# EAGLE board LilyPad_Rainbow LED-Panel-2x (EAGLE 6.4)
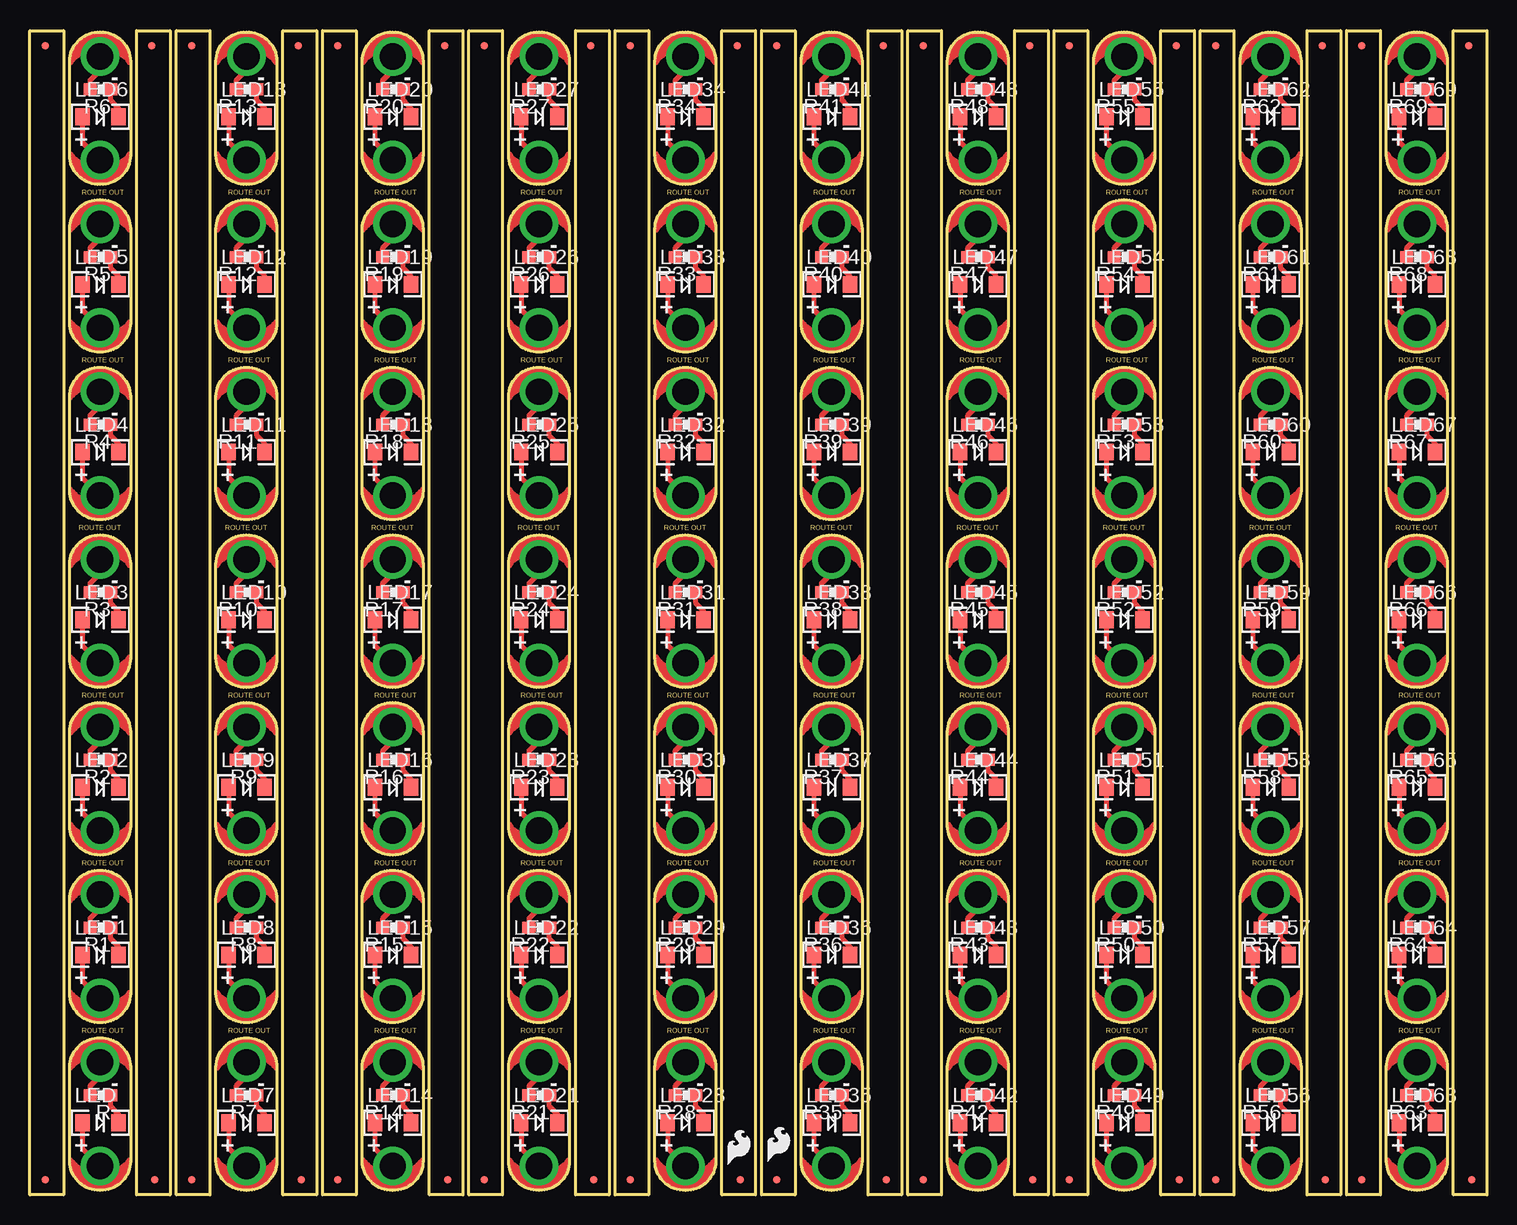
[diagram p0: board, top side]
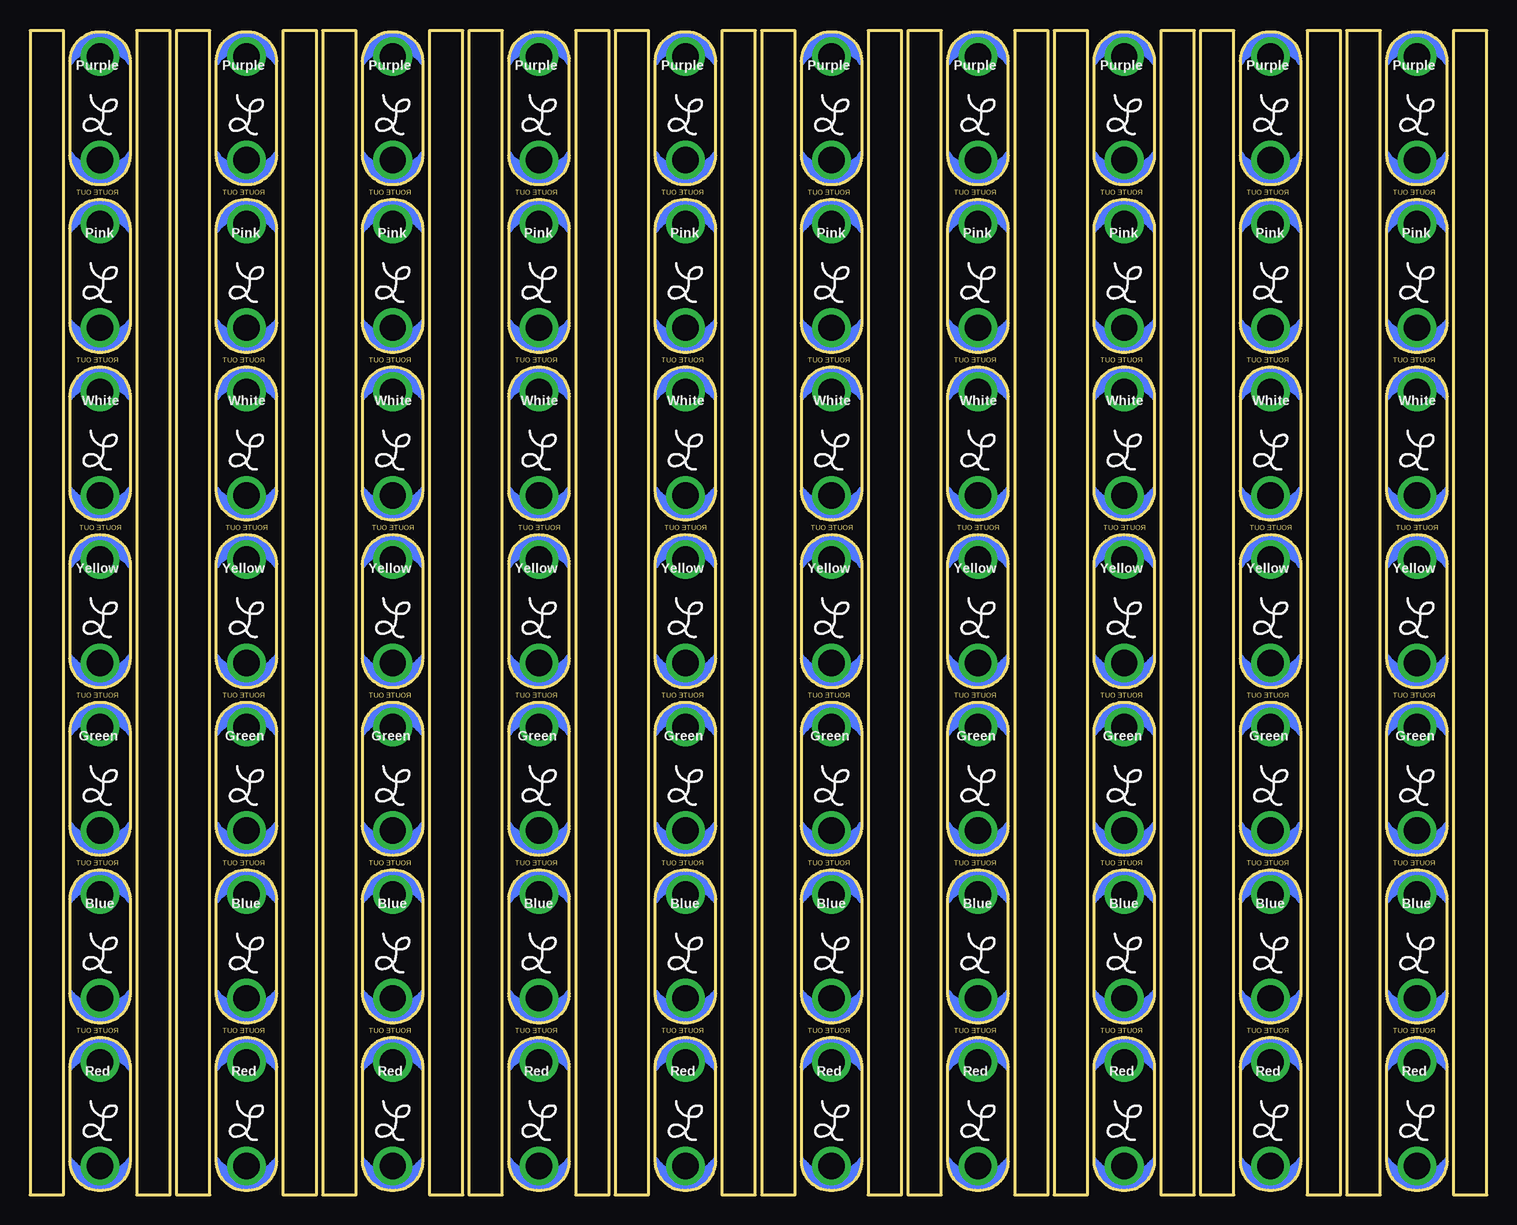
[diagram p1: board, bottom side, seen from below]

Size 121.41 x 97.03 mm. Coordinates in mm from the lower left corner, seen from the top.
Outline: 500 segments
Copper layers (1*16): Top 0.035mm / dielectric 1.5mm / Bottom 0.035mm
Design rules "SparkFun": minimum track width 8mil, minimum drill 20mil, track to track 8mil, track to pad 8mil, pad to pad 8mil, via to via 8mil, smd to smd 8mil, copper to edge 8mil, drill to drill 8mil, minimum pad ring 12mil, minimum via ring 10mil, stop-mask expansion 4mil, vias tented up to drill 20mil, thermal gap 10mil

## Footprints (pad centres in the part's own frame; a part is rotated, then mirrored left to right if it is on the bottom)
MICRO-FIDUCIAL = smd 0.635 x 0.635: 1 0,0
LED-1206 = smd 1.2 x 1.4: A -1.5,0; C 1.5,0
PETAL-SMALL = drill 2.2: 1 0,0
0603-RES = smd 1.1 x 1: 1 -0.85,0; 2 0.85,0

## Placement (x,y rotation side)
E$1  [MICRO-FIDUCIAL]  1.27,95.76 0 top
E$2  [MICRO-FIDUCIAL]  10.16,95.76 0 top
E$3  [MICRO-FIDUCIAL]  1.27,1.27 0 top
E$4  [MICRO-FIDUCIAL]  10.41,1.27 0 top
E$5  [MICRO-FIDUCIAL]  13.46,95.76 0 top
E$6  [MICRO-FIDUCIAL]  22.35,95.76 0 top
E$7  [MICRO-FIDUCIAL]  13.46,1.27 0 top
E$8  [MICRO-FIDUCIAL]  22.61,1.27 0 top
E$9  [MICRO-FIDUCIAL]  25.65,95.76 0 top
E$10  [MICRO-FIDUCIAL]  34.54,95.76 0 top
E$11  [MICRO-FIDUCIAL]  25.65,1.27 0 top
E$12  [MICRO-FIDUCIAL]  34.8,1.27 0 top
E$13  [MICRO-FIDUCIAL]  37.85,95.76 0 top
E$14  [MICRO-FIDUCIAL]  46.74,95.76 0 top
E$15  [MICRO-FIDUCIAL]  37.85,1.27 0 top
E$16  [MICRO-FIDUCIAL]  46.99,1.27 0 top
E$17  [MICRO-FIDUCIAL]  50.04,95.76 0 top
E$18  [MICRO-FIDUCIAL]  58.93,95.76 0 top
E$19  [MICRO-FIDUCIAL]  50.04,1.27 0 top
E$20  [MICRO-FIDUCIAL]  59.18,1.27 0 top
E$21  [MICRO-FIDUCIAL]  62.23,95.76 0 top
E$22  [MICRO-FIDUCIAL]  71.12,95.76 0 top
E$23  [MICRO-FIDUCIAL]  62.23,1.27 0 top
E$24  [MICRO-FIDUCIAL]  71.37,1.27 0 top
E$25  [MICRO-FIDUCIAL]  74.42,95.76 0 top
E$26  [MICRO-FIDUCIAL]  83.31,95.76 0 top
E$27  [MICRO-FIDUCIAL]  74.42,1.27 0 top
E$28  [MICRO-FIDUCIAL]  83.57,1.27 0 top
E$29  [MICRO-FIDUCIAL]  86.61,95.76 0 top
E$30  [MICRO-FIDUCIAL]  95.5,95.76 0 top
E$31  [MICRO-FIDUCIAL]  86.61,1.27 0 top
E$32  [MICRO-FIDUCIAL]  95.76,1.27 0 top
E$33  [MICRO-FIDUCIAL]  98.81,95.76 0 top
E$34  [MICRO-FIDUCIAL]  107.7,95.76 0 top
E$35  [MICRO-FIDUCIAL]  98.81,1.27 0 top
E$36  [MICRO-FIDUCIAL]  107.95,1.27 0 top
E$37  [MICRO-FIDUCIAL]  111,95.76 0 top
E$38  [MICRO-FIDUCIAL]  119.89,95.76 0 top
E$39  [MICRO-FIDUCIAL]  111,1.27 0 top
E$40  [MICRO-FIDUCIAL]  120.14,1.27 0 top
E$41  [SFE-LOGO-FLAME]  61.47,2.79 0 top
E$42  [SFE-LOGO-FLAME]  58.17,2.54 0 top
LED  White  [LED-1206]  5.86,6.02 0 top
LED1  White  [LED-1206]  5.86,19.99 0 top
LED2  White  [LED-1206]  5.86,33.96 0 top
LED3  White  [LED-1206]  5.86,47.93 0 top
LED4  White  [LED-1206]  5.86,61.9 0 top
LED5  White  [LED-1206]  5.86,75.87 0 top
LED6  White  [LED-1206]  5.86,89.84 0 top
LED7  White  [LED-1206]  18.05,6.02 0 top
LED8  White  [LED-1206]  18.05,19.99 0 top
LED9  White  [LED-1206]  18.05,33.96 0 top
LED10  White  [LED-1206]  18.05,47.93 0 top
LED11  White  [LED-1206]  18.05,61.9 0 top
LED12  White  [LED-1206]  18.05,75.87 0 top
LED13  White  [LED-1206]  18.05,89.84 0 top
LED14  White  [LED-1206]  30.25,6.02 0 top
LED15  White  [LED-1206]  30.25,19.99 0 top
LED16  White  [LED-1206]  30.25,33.96 0 top
LED17  White  [LED-1206]  30.25,47.93 0 top
LED18  White  [LED-1206]  30.25,61.9 0 top
LED19  White  [LED-1206]  30.25,75.87 0 top
LED20  White  [LED-1206]  30.25,89.84 0 top
LED21  White  [LED-1206]  42.44,6.02 0 top
LED22  White  [LED-1206]  42.44,19.99 0 top
LED23  White  [LED-1206]  42.44,33.96 0 top
LED24  White  [LED-1206]  42.44,47.93 0 top
LED25  White  [LED-1206]  42.44,61.9 0 top
LED26  White  [LED-1206]  42.44,75.87 0 top
LED27  White  [LED-1206]  42.44,89.84 0 top
LED28  White  [LED-1206]  54.63,6.02 0 top
LED29  White  [LED-1206]  54.63,19.99 0 top
LED30  White  [LED-1206]  54.63,33.96 0 top
LED31  White  [LED-1206]  54.63,47.93 0 top
LED32  White  [LED-1206]  54.63,61.9 0 top
LED33  White  [LED-1206]  54.63,75.87 0 top
LED34  White  [LED-1206]  54.63,89.84 0 top
LED35  White  [LED-1206]  66.82,6.02 0 top
LED36  White  [LED-1206]  66.82,19.99 0 top
LED37  White  [LED-1206]  66.82,33.96 0 top
LED38  White  [LED-1206]  66.82,47.93 0 top
LED39  White  [LED-1206]  66.82,61.9 0 top
LED40  White  [LED-1206]  66.82,75.87 0 top
LED41  White  [LED-1206]  66.82,89.84 0 top
LED42  White  [LED-1206]  79.01,6.02 0 top
LED43  White  [LED-1206]  79.01,19.99 0 top
LED44  White  [LED-1206]  79.01,33.96 0 top
LED45  White  [LED-1206]  79.01,47.93 0 top
LED46  White  [LED-1206]  79.01,61.9 0 top
LED47  White  [LED-1206]  79.01,75.87 0 top
LED48  White  [LED-1206]  79.01,89.84 0 top
LED49  White  [LED-1206]  91.21,6.02 0 top
LED50  White  [LED-1206]  91.21,19.99 0 top
LED51  White  [LED-1206]  91.21,33.96 0 top
LED52  White  [LED-1206]  91.21,47.93 0 top
LED53  White  [LED-1206]  91.21,61.9 0 top
LED54  White  [LED-1206]  91.21,75.87 0 top
LED55  White  [LED-1206]  91.21,89.84 0 top
LED56  White  [LED-1206]  103.4,6.02 0 top
LED57  White  [LED-1206]  103.4,19.99 0 top
LED58  White  [LED-1206]  103.4,33.96 0 top
LED59  White  [LED-1206]  103.4,47.93 0 top
LED60  White  [LED-1206]  103.4,61.9 0 top
LED61  White  [LED-1206]  103.4,75.87 0 top
LED62  White  [LED-1206]  103.4,89.84 0 top
LED63  White  [LED-1206]  115.59,6.02 0 top
LED64  White  [LED-1206]  115.59,19.99 0 top
LED65  White  [LED-1206]  115.59,33.96 0 top
LED66  White  [LED-1206]  115.59,47.93 0 top
LED67  White  [LED-1206]  115.59,61.9 0 top
LED68  White  [LED-1206]  115.59,75.87 0 top
LED69  White  [LED-1206]  115.59,89.84 0 top
LED+  SEWTAP6  [PETAL-SMALL]  5.84,2.41 0 top
LED+1  SEWTAP6  [PETAL-SMALL]  5.84,16.38 0 top
LED+2  SEWTAP6  [PETAL-SMALL]  5.84,30.35 0 top
LED+3  SEWTAP6  [PETAL-SMALL]  5.84,44.32 0 top
LED+4  SEWTAP6  [PETAL-SMALL]  5.84,58.29 0 top
LED+5  SEWTAP6  [PETAL-SMALL]  5.84,72.26 0 top
LED+6  SEWTAP6  [PETAL-SMALL]  5.84,86.23 0 top
LED+7  SEWTAP6  [PETAL-SMALL]  18.03,2.41 0 top
LED+8  SEWTAP6  [PETAL-SMALL]  18.03,16.38 0 top
LED+9  SEWTAP6  [PETAL-SMALL]  18.03,30.35 0 top
LED+10  SEWTAP6  [PETAL-SMALL]  18.03,44.32 0 top
LED+11  SEWTAP6  [PETAL-SMALL]  18.03,58.29 0 top
LED+12  SEWTAP6  [PETAL-SMALL]  18.03,72.26 0 top
LED+13  SEWTAP6  [PETAL-SMALL]  18.03,86.23 0 top
LED+14  SEWTAP6  [PETAL-SMALL]  30.23,2.41 0 top
LED+15  SEWTAP6  [PETAL-SMALL]  30.23,16.38 0 top
LED+16  SEWTAP6  [PETAL-SMALL]  30.23,30.35 0 top
LED+17  SEWTAP6  [PETAL-SMALL]  30.23,44.32 0 top
LED+18  SEWTAP6  [PETAL-SMALL]  30.23,58.29 0 top
LED+19  SEWTAP6  [PETAL-SMALL]  30.23,72.26 0 top
LED+20  SEWTAP6  [PETAL-SMALL]  30.23,86.23 0 top
LED+21  SEWTAP6  [PETAL-SMALL]  42.42,2.41 0 top
LED+22  SEWTAP6  [PETAL-SMALL]  42.42,16.38 0 top
LED+23  SEWTAP6  [PETAL-SMALL]  42.42,30.35 0 top
LED+24  SEWTAP6  [PETAL-SMALL]  42.42,44.32 0 top
LED+25  SEWTAP6  [PETAL-SMALL]  42.42,58.29 0 top
LED+26  SEWTAP6  [PETAL-SMALL]  42.42,72.26 0 top
LED+27  SEWTAP6  [PETAL-SMALL]  42.42,86.23 0 top
LED+28  SEWTAP6  [PETAL-SMALL]  54.61,2.41 0 top
LED+29  SEWTAP6  [PETAL-SMALL]  54.61,16.38 0 top
LED+30  SEWTAP6  [PETAL-SMALL]  54.61,30.35 0 top
LED+31  SEWTAP6  [PETAL-SMALL]  54.61,44.32 0 top
LED+32  SEWTAP6  [PETAL-SMALL]  54.61,58.29 0 top
LED+33  SEWTAP6  [PETAL-SMALL]  54.61,72.26 0 top
LED+34  SEWTAP6  [PETAL-SMALL]  54.61,86.23 0 top
LED+35  SEWTAP6  [PETAL-SMALL]  66.8,2.41 0 top
LED+36  SEWTAP6  [PETAL-SMALL]  66.8,16.38 0 top
LED+37  SEWTAP6  [PETAL-SMALL]  66.8,30.35 0 top
LED+38  SEWTAP6  [PETAL-SMALL]  66.8,44.32 0 top
LED+39  SEWTAP6  [PETAL-SMALL]  66.8,58.29 0 top
LED+40  SEWTAP6  [PETAL-SMALL]  66.8,72.26 0 top
LED+41  SEWTAP6  [PETAL-SMALL]  66.8,86.23 0 top
LED+42  SEWTAP6  [PETAL-SMALL]  78.99,2.41 0 top
LED+43  SEWTAP6  [PETAL-SMALL]  78.99,16.38 0 top
LED+44  SEWTAP6  [PETAL-SMALL]  78.99,30.35 0 top
LED+45  SEWTAP6  [PETAL-SMALL]  78.99,44.32 0 top
LED+46  SEWTAP6  [PETAL-SMALL]  78.99,58.29 0 top
LED+47  SEWTAP6  [PETAL-SMALL]  78.99,72.26 0 top
LED+48  SEWTAP6  [PETAL-SMALL]  78.99,86.23 0 top
LED+49  SEWTAP6  [PETAL-SMALL]  91.19,2.41 0 top
LED+50  SEWTAP6  [PETAL-SMALL]  91.19,16.38 0 top
LED+51  SEWTAP6  [PETAL-SMALL]  91.19,30.35 0 top
LED+52  SEWTAP6  [PETAL-SMALL]  91.19,44.32 0 top
LED+53  SEWTAP6  [PETAL-SMALL]  91.19,58.29 0 top
LED+54  SEWTAP6  [PETAL-SMALL]  91.19,72.26 0 top
LED+55  SEWTAP6  [PETAL-SMALL]  91.19,86.23 0 top
LED+56  SEWTAP6  [PETAL-SMALL]  103.38,2.41 0 top
LED+57  SEWTAP6  [PETAL-SMALL]  103.38,16.38 0 top
LED+58  SEWTAP6  [PETAL-SMALL]  103.38,30.35 0 top
LED+59  SEWTAP6  [PETAL-SMALL]  103.38,44.32 0 top
LED+60  SEWTAP6  [PETAL-SMALL]  103.38,58.29 0 top
LED+61  SEWTAP6  [PETAL-SMALL]  103.38,72.26 0 top
LED+62  SEWTAP6  [PETAL-SMALL]  103.38,86.23 0 top
LED+63  SEWTAP6  [PETAL-SMALL]  115.57,2.41 0 top
LED+64  SEWTAP6  [PETAL-SMALL]  115.57,16.38 0 top
LED+65  SEWTAP6  [PETAL-SMALL]  115.57,30.35 0 top
LED+66  SEWTAP6  [PETAL-SMALL]  115.57,44.32 0 top
LED+67  SEWTAP6  [PETAL-SMALL]  115.57,58.29 0 top
LED+68  SEWTAP6  [PETAL-SMALL]  115.57,72.26 0 top
LED+69  SEWTAP6  [PETAL-SMALL]  115.57,86.23 0 top
LED-  SEWTAP6  [PETAL-SMALL]  5.84,11.05 180 top
LED-1  SEWTAP6  [PETAL-SMALL]  5.84,25.02 180 top
LED-2  SEWTAP6  [PETAL-SMALL]  5.84,38.99 180 top
LED-3  SEWTAP6  [PETAL-SMALL]  5.84,52.96 180 top
LED-4  SEWTAP6  [PETAL-SMALL]  5.84,66.93 180 top
LED-5  SEWTAP6  [PETAL-SMALL]  5.84,80.9 180 top
LED-6  SEWTAP6  [PETAL-SMALL]  5.84,94.87 180 top
LED-7  SEWTAP6  [PETAL-SMALL]  18.03,11.05 180 top
LED-8  SEWTAP6  [PETAL-SMALL]  18.03,25.02 180 top
LED-9  SEWTAP6  [PETAL-SMALL]  18.03,38.99 180 top
LED-10  SEWTAP6  [PETAL-SMALL]  18.03,52.96 180 top
LED-11  SEWTAP6  [PETAL-SMALL]  18.03,66.93 180 top
LED-12  SEWTAP6  [PETAL-SMALL]  18.03,80.9 180 top
LED-13  SEWTAP6  [PETAL-SMALL]  18.03,94.87 180 top
LED-14  SEWTAP6  [PETAL-SMALL]  30.23,11.05 180 top
LED-15  SEWTAP6  [PETAL-SMALL]  30.23,25.02 180 top
LED-16  SEWTAP6  [PETAL-SMALL]  30.23,38.99 180 top
LED-17  SEWTAP6  [PETAL-SMALL]  30.23,52.96 180 top
LED-18  SEWTAP6  [PETAL-SMALL]  30.23,66.93 180 top
LED-19  SEWTAP6  [PETAL-SMALL]  30.23,80.9 180 top
LED-20  SEWTAP6  [PETAL-SMALL]  30.23,94.87 180 top
LED-21  SEWTAP6  [PETAL-SMALL]  42.42,11.05 180 top
LED-22  SEWTAP6  [PETAL-SMALL]  42.42,25.02 180 top
LED-23  SEWTAP6  [PETAL-SMALL]  42.42,38.99 180 top
LED-24  SEWTAP6  [PETAL-SMALL]  42.42,52.96 180 top
LED-25  SEWTAP6  [PETAL-SMALL]  42.42,66.93 180 top
LED-26  SEWTAP6  [PETAL-SMALL]  42.42,80.9 180 top
LED-27  SEWTAP6  [PETAL-SMALL]  42.42,94.87 180 top
LED-28  SEWTAP6  [PETAL-SMALL]  54.61,11.05 180 top
LED-29  SEWTAP6  [PETAL-SMALL]  54.61,25.02 180 top
LED-30  SEWTAP6  [PETAL-SMALL]  54.61,38.99 180 top
LED-31  SEWTAP6  [PETAL-SMALL]  54.61,52.96 180 top
LED-32  SEWTAP6  [PETAL-SMALL]  54.61,66.93 180 top
LED-33  SEWTAP6  [PETAL-SMALL]  54.61,80.9 180 top
LED-34  SEWTAP6  [PETAL-SMALL]  54.61,94.87 180 top
LED-35  SEWTAP6  [PETAL-SMALL]  66.8,11.05 180 top
LED-36  SEWTAP6  [PETAL-SMALL]  66.8,25.02 180 top
LED-37  SEWTAP6  [PETAL-SMALL]  66.8,38.99 180 top
LED-38  SEWTAP6  [PETAL-SMALL]  66.8,52.96 180 top
LED-39  SEWTAP6  [PETAL-SMALL]  66.8,66.93 180 top
LED-40  SEWTAP6  [PETAL-SMALL]  66.8,80.9 180 top
LED-41  SEWTAP6  [PETAL-SMALL]  66.8,94.87 180 top
LED-42  SEWTAP6  [PETAL-SMALL]  78.99,11.05 180 top
LED-43  SEWTAP6  [PETAL-SMALL]  78.99,25.02 180 top
LED-44  SEWTAP6  [PETAL-SMALL]  78.99,38.99 180 top
LED-45  SEWTAP6  [PETAL-SMALL]  78.99,52.96 180 top
LED-46  SEWTAP6  [PETAL-SMALL]  78.99,66.93 180 top
LED-47  SEWTAP6  [PETAL-SMALL]  78.99,80.9 180 top
LED-48  SEWTAP6  [PETAL-SMALL]  78.99,94.87 180 top
LED-49  SEWTAP6  [PETAL-SMALL]  91.19,11.05 180 top
LED-50  SEWTAP6  [PETAL-SMALL]  91.19,25.02 180 top
LED-51  SEWTAP6  [PETAL-SMALL]  91.19,38.99 180 top
LED-52  SEWTAP6  [PETAL-SMALL]  91.19,52.96 180 top
LED-53  SEWTAP6  [PETAL-SMALL]  91.19,66.93 180 top
LED-54  SEWTAP6  [PETAL-SMALL]  91.19,80.9 180 top
LED-55  SEWTAP6  [PETAL-SMALL]  91.19,94.87 180 top
LED-56  SEWTAP6  [PETAL-SMALL]  103.38,11.05 180 top
LED-57  SEWTAP6  [PETAL-SMALL]  103.38,25.02 180 top
LED-58  SEWTAP6  [PETAL-SMALL]  103.38,38.99 180 top
LED-59  SEWTAP6  [PETAL-SMALL]  103.38,52.96 180 top
LED-60  SEWTAP6  [PETAL-SMALL]  103.38,66.93 180 top
LED-61  SEWTAP6  [PETAL-SMALL]  103.38,80.9 180 top
LED-62  SEWTAP6  [PETAL-SMALL]  103.38,94.87 180 top
LED-63  SEWTAP6  [PETAL-SMALL]  115.57,11.05 180 top
LED-64  SEWTAP6  [PETAL-SMALL]  115.57,25.02 180 top
LED-65  SEWTAP6  [PETAL-SMALL]  115.57,38.99 180 top
LED-66  SEWTAP6  [PETAL-SMALL]  115.57,52.96 180 top
LED-67  SEWTAP6  [PETAL-SMALL]  115.57,66.93 180 top
LED-68  SEWTAP6  [PETAL-SMALL]  115.57,80.9 180 top
LED-69  SEWTAP6  [PETAL-SMALL]  115.57,94.87 180 top
LOGO1  LOGO-LPL  [LOGO-L]  5.84,6.17 0 bottom
LOGO2  LOGO-LPL  [LOGO-L]  5.84,20.14 0 bottom
LOGO3  LOGO-LPL  [LOGO-L]  5.84,34.11 0 bottom
LOGO4  LOGO-LPL  [LOGO-L]  5.84,48.08 0 bottom
LOGO5  LOGO-LPL  [LOGO-L]  5.84,62.05 0 bottom
LOGO6  LOGO-LPL  [LOGO-L]  5.84,76.02 0 bottom
LOGO7  LOGO-LPL  [LOGO-L]  5.84,89.99 0 bottom
LOGO8  LOGO-LPL  [LOGO-L]  18.03,6.17 0 bottom
LOGO9  LOGO-LPL  [LOGO-L]  18.03,20.14 0 bottom
LOGO10  LOGO-LPL  [LOGO-L]  18.03,34.11 0 bottom
LOGO11  LOGO-LPL  [LOGO-L]  18.03,48.08 0 bottom
LOGO12  LOGO-LPL  [LOGO-L]  18.03,62.05 0 bottom
LOGO13  LOGO-LPL  [LOGO-L]  18.03,76.02 0 bottom
LOGO14  LOGO-LPL  [LOGO-L]  18.03,89.99 0 bottom
LOGO15  LOGO-LPL  [LOGO-L]  30.23,6.17 0 bottom
LOGO16  LOGO-LPL  [LOGO-L]  30.23,20.14 0 bottom
LOGO17  LOGO-LPL  [LOGO-L]  30.23,34.11 0 bottom
LOGO18  LOGO-LPL  [LOGO-L]  30.23,48.08 0 bottom
LOGO19  LOGO-LPL  [LOGO-L]  30.23,62.05 0 bottom
LOGO20  LOGO-LPL  [LOGO-L]  30.23,76.02 0 bottom
LOGO21  LOGO-LPL  [LOGO-L]  30.23,89.99 0 bottom
LOGO22  LOGO-LPL  [LOGO-L]  42.42,6.17 0 bottom
LOGO23  LOGO-LPL  [LOGO-L]  42.42,20.14 0 bottom
LOGO24  LOGO-LPL  [LOGO-L]  42.42,34.11 0 bottom
LOGO25  LOGO-LPL  [LOGO-L]  42.42,48.08 0 bottom
LOGO26  LOGO-LPL  [LOGO-L]  42.42,62.05 0 bottom
LOGO27  LOGO-LPL  [LOGO-L]  42.42,76.02 0 bottom
LOGO28  LOGO-LPL  [LOGO-L]  42.42,89.99 0 bottom
LOGO29  LOGO-LPL  [LOGO-L]  54.61,6.17 0 bottom
LOGO30  LOGO-LPL  [LOGO-L]  54.61,20.14 0 bottom
LOGO31  LOGO-LPL  [LOGO-L]  54.61,34.11 0 bottom
LOGO32  LOGO-LPL  [LOGO-L]  54.61,48.08 0 bottom
LOGO33  LOGO-LPL  [LOGO-L]  54.61,62.05 0 bottom
LOGO34  LOGO-LPL  [LOGO-L]  54.61,76.02 0 bottom
LOGO35  LOGO-LPL  [LOGO-L]  54.61,89.99 0 bottom
LOGO36  LOGO-LPL  [LOGO-L]  66.8,6.17 0 bottom
LOGO37  LOGO-LPL  [LOGO-L]  66.8,20.14 0 bottom
LOGO38  LOGO-LPL  [LOGO-L]  66.8,34.11 0 bottom
LOGO39  LOGO-LPL  [LOGO-L]  66.8,48.08 0 bottom
LOGO40  LOGO-LPL  [LOGO-L]  66.8,62.05 0 bottom
LOGO41  LOGO-LPL  [LOGO-L]  66.8,76.02 0 bottom
LOGO42  LOGO-LPL  [LOGO-L]  66.8,89.99 0 bottom
LOGO43  LOGO-LPL  [LOGO-L]  78.99,6.17 0 bottom
LOGO44  LOGO-LPL  [LOGO-L]  78.99,20.14 0 bottom
LOGO45  LOGO-LPL  [LOGO-L]  78.99,34.11 0 bottom
LOGO46  LOGO-LPL  [LOGO-L]  78.99,48.08 0 bottom
LOGO47  LOGO-LPL  [LOGO-L]  78.99,62.05 0 bottom
LOGO48  LOGO-LPL  [LOGO-L]  78.99,76.02 0 bottom
LOGO49  LOGO-LPL  [LOGO-L]  78.99,89.99 0 bottom
LOGO50  LOGO-LPL  [LOGO-L]  91.19,6.17 0 bottom
LOGO51  LOGO-LPL  [LOGO-L]  91.19,20.14 0 bottom
LOGO52  LOGO-LPL  [LOGO-L]  91.19,34.11 0 bottom
LOGO53  LOGO-LPL  [LOGO-L]  91.19,48.08 0 bottom
LOGO54  LOGO-LPL  [LOGO-L]  91.19,62.05 0 bottom
LOGO55  LOGO-LPL  [LOGO-L]  91.19,76.02 0 bottom
LOGO56  LOGO-LPL  [LOGO-L]  91.19,89.99 0 bottom
LOGO57  LOGO-LPL  [LOGO-L]  103.38,6.17 0 bottom
LOGO58  LOGO-LPL  [LOGO-L]  103.38,20.14 0 bottom
LOGO59  LOGO-LPL  [LOGO-L]  103.38,34.11 0 bottom
LOGO60  LOGO-LPL  [LOGO-L]  103.38,48.08 0 bottom
LOGO61  LOGO-LPL  [LOGO-L]  103.38,62.05 0 bottom
LOGO62  LOGO-LPL  [LOGO-L]  103.38,76.02 0 bottom
LOGO63  LOGO-LPL  [LOGO-L]  103.38,89.99 0 bottom
LOGO64  LOGO-LPL  [LOGO-L]  115.57,6.17 0 bottom
LOGO65  LOGO-LPL  [LOGO-L]  115.57,20.14 0 bottom
LOGO66  LOGO-LPL  [LOGO-L]  115.57,34.11 0 bottom
LOGO67  LOGO-LPL  [LOGO-L]  115.57,48.08 0 bottom
LOGO68  LOGO-LPL  [LOGO-L]  115.57,62.05 0 bottom
LOGO69  LOGO-LPL  [LOGO-L]  115.57,76.02 0 bottom
LOGO70  LOGO-LPL  [LOGO-L]  115.57,89.99 0 bottom
R  100  [0603-RES]  5.86,8.3 180 top
R1  100  [0603-RES]  5.86,22.27 180 top
R2  100  [0603-RES]  5.86,36.25 180 top
R3  100  [0603-RES]  5.86,50.22 180 top
R4  100  [0603-RES]  5.86,64.19 180 top
R5  100  [0603-RES]  5.86,78.16 180 top
R6  100  [0603-RES]  5.86,92.12 180 top
R7  100  [0603-RES]  18.05,8.3 180 top
R8  100  [0603-RES]  18.05,22.27 180 top
R9  100  [0603-RES]  18.05,36.25 180 top
R10  100  [0603-RES]  18.05,50.22 180 top
R11  100  [0603-RES]  18.05,64.19 180 top
R12  100  [0603-RES]  18.05,78.16 180 top
R13  100  [0603-RES]  18.05,92.12 180 top
R14  100  [0603-RES]  30.25,8.3 180 top
R15  100  [0603-RES]  30.25,22.27 180 top
R16  100  [0603-RES]  30.25,36.25 180 top
R17  100  [0603-RES]  30.25,50.22 180 top
R18  100  [0603-RES]  30.25,64.19 180 top
R19  100  [0603-RES]  30.25,78.16 180 top
R20  100  [0603-RES]  30.25,92.12 180 top
R21  100  [0603-RES]  42.44,8.3 180 top
R22  100  [0603-RES]  42.44,22.27 180 top
R23  100  [0603-RES]  42.44,36.25 180 top
R24  100  [0603-RES]  42.44,50.22 180 top
R25  100  [0603-RES]  42.44,64.19 180 top
R26  100  [0603-RES]  42.44,78.16 180 top
R27  100  [0603-RES]  42.44,92.12 180 top
R28  100  [0603-RES]  54.63,8.3 180 top
R29  100  [0603-RES]  54.63,22.27 180 top
R30  100  [0603-RES]  54.63,36.25 180 top
R31  100  [0603-RES]  54.63,50.22 180 top
R32  100  [0603-RES]  54.63,64.19 180 top
R33  100  [0603-RES]  54.63,78.16 180 top
R34  100  [0603-RES]  54.63,92.12 180 top
R35  100  [0603-RES]  66.82,8.3 180 top
R36  100  [0603-RES]  66.82,22.27 180 top
R37  100  [0603-RES]  66.82,36.25 180 top
R38  100  [0603-RES]  66.82,50.22 180 top
R39  100  [0603-RES]  66.82,64.19 180 top
R40  100  [0603-RES]  66.82,78.16 180 top
R41  100  [0603-RES]  66.82,92.12 180 top
R42  100  [0603-RES]  79.01,8.3 180 top
R43  100  [0603-RES]  79.01,22.27 180 top
R44  100  [0603-RES]  79.01,36.25 180 top
R45  100  [0603-RES]  79.01,50.22 180 top
R46  100  [0603-RES]  79.01,64.19 180 top
R47  100  [0603-RES]  79.01,78.16 180 top
R48  100  [0603-RES]  79.01,92.12 180 top
R49  100  [0603-RES]  91.21,8.3 180 top
R50  100  [0603-RES]  91.21,22.27 180 top
R51  100  [0603-RES]  91.21,36.25 180 top
R52  100  [0603-RES]  91.21,50.22 180 top
R53  100  [0603-RES]  91.21,64.19 180 top
R54  100  [0603-RES]  91.21,78.16 180 top
R55  100  [0603-RES]  91.21,92.12 180 top
R56  100  [0603-RES]  103.4,8.3 180 top
R57  100  [0603-RES]  103.4,22.27 180 top
R58  100  [0603-RES]  103.4,36.25 180 top
R59  100  [0603-RES]  103.4,50.22 180 top
R60  100  [0603-RES]  103.4,64.19 180 top
R61  100  [0603-RES]  103.4,78.16 180 top
R62  100  [0603-RES]  103.4,92.12 180 top
R63  100  [0603-RES]  115.59,8.3 180 top
R64  100  [0603-RES]  115.59,22.27 180 top
R65  100  [0603-RES]  115.59,36.25 180 top
R66  100  [0603-RES]  115.59,50.22 180 top
R67  100  [0603-RES]  115.59,64.19 180 top
R68  100  [0603-RES]  115.59,78.16 180 top
R69  100  [0603-RES]  115.59,92.12 180 top

## Library data of the parts
E$1-E$42 = SparkFun-Aesthetics
LED LED1-LED69 = SparkFun-3-2-07
LED+ LED+1-LED+69 LED- LED-1-LED-69 LOGO1-LOGO70 = LilyPad-Wearables
R R1-R69 = SparkFun

## Nets
+: LED+.1 LED.A
+1: LED1.A LED+1.1
+2: LED2.A LED+2.1
+3: LED3.A LED+3.1
+4: LED4.A LED+4.1
+5: LED5.A LED+5.1
+6: LED6.A LED+6.1
+7: LED7.A LED+7.1
+8: LED8.A LED+8.1
+9: LED9.A LED+9.1
+10: LED10.A LED+10.1
+11: LED11.A LED+11.1
+12: LED12.A LED+12.1
+13: LED13.A LED+13.1
+14: LED14.A LED+14.1
+15: LED15.A LED+15.1
+16: LED16.A LED+16.1
+17: LED17.A LED+17.1
+18: LED18.A LED+18.1
+19: LED19.A LED+19.1
+20: LED20.A LED+20.1
+21: LED21.A LED+21.1
+22: LED22.A LED+22.1
+23: LED23.A LED+23.1
+24: LED24.A LED+24.1
+25: LED25.A LED+25.1
+26: LED26.A LED+26.1
+27: LED27.A LED+27.1
+28: LED28.A LED+28.1
+29: LED29.A LED+29.1
+30: LED30.A LED+30.1
+31: LED31.A LED+31.1
+32: LED32.A LED+32.1
+33: LED33.A LED+33.1
+34: LED34.A LED+34.1
+35: LED35.A LED+35.1
+36: LED36.A LED+36.1
+37: LED37.A LED+37.1
+38: LED38.A LED+38.1
+39: LED39.A LED+39.1
+40: LED40.A LED+40.1
+41: LED41.A LED+41.1
+42: LED42.A LED+42.1
+43: LED43.A LED+43.1
+44: LED44.A LED+44.1
+45: LED45.A LED+45.1
+46: LED46.A LED+46.1
+47: LED47.A LED+47.1
+48: LED48.A LED+48.1
+49: LED49.A LED+49.1
+50: LED50.A LED+50.1
+51: LED51.A LED+51.1
+52: LED52.A LED+52.1
+53: LED53.A LED+53.1
+54: LED54.A LED+54.1
+55: LED55.A LED+55.1
+56: LED56.A LED+56.1
+57: LED57.A LED+57.1
+58: LED58.A LED+58.1
+59: LED59.A LED+59.1
+60: LED60.A LED+60.1
+61: LED61.A LED+61.1
+62: LED62.A LED+62.1
+63: LED63.A LED+63.1
+64: LED64.A LED+64.1
+65: LED65.A LED+65.1
+66: LED66.A LED+66.1
+67: LED67.A LED+67.1
+68: LED68.A LED+68.1
+69: LED69.A LED+69.1
-: LED-.1 R.2
-1: LED-1.1 R1.2
-2: LED-2.1 R2.2
-3: LED-3.1 R3.2
-4: LED-4.1 R4.2
-5: LED-5.1 R5.2
-6: LED-6.1 R6.2
-7: LED-7.1 R7.2
-8: LED-8.1 R8.2
-9: LED-9.1 R9.2
-10: LED-10.1 R10.2
-11: LED-11.1 R11.2
-12: LED-12.1 R12.2
-13: LED-13.1 R13.2
-14: LED-14.1 R14.2
-15: LED-15.1 R15.2
-16: LED-16.1 R16.2
-17: LED-17.1 R17.2
-18: LED-18.1 R18.2
-19: LED-19.1 R19.2
-20: LED-20.1 R20.2
-21: LED-21.1 R21.2
-22: LED-22.1 R22.2
-23: LED-23.1 R23.2
-24: LED-24.1 R24.2
-25: LED-25.1 R25.2
-26: LED-26.1 R26.2
-27: LED-27.1 R27.2
-28: LED-28.1 R28.2
-29: LED-29.1 R29.2
-30: LED-30.1 R30.2
-31: LED-31.1 R31.2
-32: LED-32.1 R32.2
-33: LED-33.1 R33.2
-34: LED-34.1 R34.2
-35: LED-35.1 R35.2
-36: LED-36.1 R36.2
-37: LED-37.1 R37.2
-38: LED-38.1 R38.2
-39: LED-39.1 R39.2
-40: LED-40.1 R40.2
-41: LED-41.1 R41.2
-42: LED-42.1 R42.2
-43: LED-43.1 R43.2
-44: LED-44.1 R44.2
-45: LED-45.1 R45.2
-46: LED-46.1 R46.2
-47: LED-47.1 R47.2
-48: LED-48.1 R48.2
-49: LED-49.1 R49.2
-50: LED-50.1 R50.2
-51: LED-51.1 R51.2
-52: LED-52.1 R52.2
-53: LED-53.1 R53.2
-54: LED-54.1 R54.2
-55: LED-55.1 R55.2
-56: LED-56.1 R56.2
-57: LED-57.1 R57.2
-58: LED-58.1 R58.2
-59: LED-59.1 R59.2
-60: LED-60.1 R60.2
-61: LED-61.1 R61.2
-62: LED-62.1 R62.2
-63: LED-63.1 R63.2
-64: LED-64.1 R64.2
-65: LED-65.1 R65.2
-66: LED-66.1 R66.2
-67: LED-67.1 R67.2
-68: LED-68.1 R68.2
-69: LED-69.1 R69.2
N$1: LED.C R.1
N$2: LED1.C R1.1
N$3: LED2.C R2.1
N$4: LED3.C R3.1
N$5: LED4.C R4.1
N$6: LED5.C R5.1
N$7: LED6.C R6.1
N$8: LED7.C R7.1
N$9: LED8.C R8.1
N$10: LED9.C R9.1
N$11: LED10.C R10.1
N$12: LED11.C R11.1
N$13: LED12.C R12.1
N$14: LED13.C R13.1
N$15: LED14.C R14.1
N$16: LED15.C R15.1
N$17: LED16.C R16.1
N$18: LED17.C R17.1
N$19: LED18.C R18.1
N$20: LED19.C R19.1
N$21: LED20.C R20.1
N$22: LED21.C R21.1
N$23: LED22.C R22.1
N$24: LED23.C R23.1
N$25: LED24.C R24.1
N$26: LED25.C R25.1
N$27: LED26.C R26.1
N$28: LED27.C R27.1
N$29: LED28.C R28.1
N$30: LED29.C R29.1
N$31: LED30.C R30.1
N$32: LED31.C R31.1
N$33: LED32.C R32.1
N$34: LED33.C R33.1
N$35: LED34.C R34.1
N$36: LED35.C R35.1
N$37: LED36.C R36.1
N$38: LED37.C R37.1
N$39: LED38.C R38.1
N$40: LED39.C R39.1
N$41: LED40.C R40.1
N$42: LED41.C R41.1
N$43: LED42.C R42.1
N$44: LED43.C R43.1
N$45: LED44.C R44.1
N$46: LED45.C R45.1
N$47: LED46.C R46.1
N$48: LED47.C R47.1
N$49: LED48.C R48.1
N$50: LED49.C R49.1
N$51: LED50.C R50.1
N$52: LED51.C R51.1
N$53: LED52.C R52.1
N$54: LED53.C R53.1
N$55: LED54.C R54.1
N$56: LED55.C R55.1
N$57: LED56.C R56.1
N$58: LED57.C R57.1
N$59: LED58.C R58.1
N$60: LED59.C R59.1
N$61: LED60.C R60.1
N$62: LED61.C R61.1
N$63: LED62.C R62.1
N$64: LED63.C R63.1
N$65: LED64.C R64.1
N$66: LED65.C R65.1
N$67: LED66.C R66.1
N$68: LED67.C R67.1
N$69: LED68.C R68.1
N$70: LED69.C R69.1

## Tracks (layer width: path | path; a pad name or v marks a point on that pad's centre or on a via)
+
  Top 0.406: 5.84,2.29 LED+.1 4.36,3.89 LED.A
+1
  Top 0.406: 5.84,16.26 LED+1.1 4.36,17.86 LED1.A
+2
  Top 0.406: 5.84,30.23 LED+2.1 4.36,31.83 LED2.A
+3
  Top 0.406: 5.84,44.2 LED+3.1 4.36,45.8 LED3.A
+4
  Top 0.406: 5.84,58.17 LED+4.1 4.36,59.77 LED4.A
+5
  Top 0.406: 5.84,72.14 LED+5.1 4.36,73.74 LED5.A
+6
  Top 0.406: 5.84,86.11 LED+6.1 4.36,87.71 LED6.A
+7
  Top 0.406: 18.03,2.29 LED+7.1 16.55,3.89 LED7.A
+8
  Top 0.406: 18.03,16.26 LED+8.1 16.55,17.86 LED8.A
+9
  Top 0.406: 18.03,30.23 LED+9.1 16.55,31.83 LED9.A
+10
  Top 0.406: 18.03,44.2 LED+10.1 16.55,45.8 LED10.A
+11
  Top 0.406: 18.03,58.17 LED+11.1 16.55,59.77 LED11.A
+12
  Top 0.406: 18.03,72.14 LED+12.1 16.55,73.74 LED12.A
+13
  Top 0.406: 18.03,86.11 LED+13.1 16.55,87.71 LED13.A
+14
  Top 0.406: 30.23,2.29 LED+14.1 28.75,3.89 LED14.A
+15
  Top 0.406: 30.23,16.26 LED+15.1 28.75,17.86 LED15.A
+16
  Top 0.406: 30.23,30.23 LED+16.1 28.75,31.83 LED16.A
+17
  Top 0.406: 30.23,44.2 LED+17.1 28.75,45.8 LED17.A
+18
  Top 0.406: 30.23,58.17 LED+18.1 28.75,59.77 LED18.A
+19
  Top 0.406: 30.23,72.14 LED+19.1 28.75,73.74 LED19.A
+20
  Top 0.406: 30.23,86.11 LED+20.1 28.75,87.71 LED20.A
+21
  Top 0.406: 42.42,2.29 LED+21.1 40.94,3.89 LED21.A
+22
  Top 0.406: 42.42,16.26 LED+22.1 40.94,17.86 LED22.A
+23
  Top 0.406: 42.42,30.23 LED+23.1 40.94,31.83 LED23.A
+24
  Top 0.406: 42.42,44.2 LED+24.1 40.94,45.8 LED24.A
+25
  Top 0.406: 42.42,58.17 LED+25.1 40.94,59.77 LED25.A
+26
  Top 0.406: 42.42,72.14 LED+26.1 40.94,73.74 LED26.A
+27
  Top 0.406: 42.42,86.11 LED+27.1 40.94,87.71 LED27.A
+28
  Top 0.406: 54.61,2.29 LED+28.1 53.13,3.89 LED28.A
+29
  Top 0.406: 54.61,16.26 LED+29.1 53.13,17.86 LED29.A
+30
  Top 0.406: 54.61,30.23 LED+30.1 53.13,31.83 LED30.A
+31
  Top 0.406: 54.61,44.2 LED+31.1 53.13,45.8 LED31.A
+32
  Top 0.406: 54.61,58.17 LED+32.1 53.13,59.77 LED32.A
+33
  Top 0.406: 54.61,72.14 LED+33.1 53.13,73.74 LED33.A
+34
  Top 0.406: 54.61,86.11 LED+34.1 53.13,87.71 LED34.A
+35
  Top 0.406: 66.8,2.29 LED+35.1 65.32,3.89 LED35.A
+36
  Top 0.406: 66.8,16.26 LED+36.1 65.32,17.86 LED36.A
+37
  Top 0.406: 66.8,30.23 LED+37.1 65.32,31.83 LED37.A
+38
  Top 0.406: 66.8,44.2 LED+38.1 65.32,45.8 LED38.A
+39
  Top 0.406: 66.8,58.17 LED+39.1 65.32,59.77 LED39.A
+40
  Top 0.406: 66.8,72.14 LED+40.1 65.32,73.74 LED40.A
+41
  Top 0.406: 66.8,86.11 LED+41.1 65.32,87.71 LED41.A
+42
  Top 0.406: 78.99,2.29 LED+42.1 77.51,3.89 LED42.A
+43
  Top 0.406: 78.99,16.26 LED+43.1 77.51,17.86 LED43.A
+44
  Top 0.406: 78.99,30.23 LED+44.1 77.51,31.83 LED44.A
+45
  Top 0.406: 78.99,44.2 LED+45.1 77.51,45.8 LED45.A
+46
  Top 0.406: 78.99,58.17 LED+46.1 77.51,59.77 LED46.A
+47
  Top 0.406: 78.99,72.14 LED+47.1 77.51,73.74 LED47.A
+48
  Top 0.406: 78.99,86.11 LED+48.1 77.51,87.71 LED48.A
+49
  Top 0.406: 91.19,2.29 LED+49.1 89.71,3.89 LED49.A
+50
  Top 0.406: 91.19,16.26 LED+50.1 89.71,17.86 LED50.A
+51
  Top 0.406: 91.19,30.23 LED+51.1 89.71,31.83 LED51.A
+52
  Top 0.406: 91.19,44.2 LED+52.1 89.71,45.8 LED52.A
+53
  Top 0.406: 91.19,58.17 LED+53.1 89.71,59.77 LED53.A
+54
  Top 0.406: 91.19,72.14 LED+54.1 89.71,73.74 LED54.A
+55
  Top 0.406: 91.19,86.11 LED+55.1 89.71,87.71 LED55.A
+56
  Top 0.406: 103.38,2.29 LED+56.1 101.9,3.89 LED56.A
+57
  Top 0.406: 103.38,16.26 LED+57.1 101.9,17.86 LED57.A
+58
  Top 0.406: 103.38,30.23 LED+58.1 101.9,31.83 LED58.A
+59
  Top 0.406: 103.38,44.2 LED+59.1 101.9,45.8 LED59.A
+60
  Top 0.406: 103.38,58.17 LED+60.1 101.9,59.77 LED60.A
+61
  Top 0.406: 103.38,72.14 LED+61.1 101.9,73.74 LED61.A
+62
  Top 0.406: 103.38,86.11 LED+62.1 101.9,87.71 LED62.A
+63
  Top 0.406: 115.57,2.29 LED+63.1 114.09,3.89 LED63.A
+64
  Top 0.406: 115.57,16.26 LED+64.1 114.09,17.86 LED64.A
+65
  Top 0.406: 115.57,30.23 LED+65.1 114.09,31.83 LED65.A
+66
  Top 0.406: 115.57,44.2 LED+66.1 114.09,45.8 LED66.A
+67
  Top 0.406: 115.57,58.17 LED+67.1 114.09,59.77 LED67.A
+68
  Top 0.406: 115.57,72.14 LED+68.1 114.09,73.74 LED68.A
+69
  Top 0.406: 115.57,86.11 LED+69.1 114.09,87.71 LED69.A
-
  Top 0.406: LED-.1 5.84,9.91 5.01,9.08 R.2
-1
  Top 0.406: LED-1.1 5.84,23.88 5.01,23.05 R1.2
-2
  Top 0.406: LED-2.1 5.84,37.85 5.01,37.02 R2.2
-3
  Top 0.406: LED-3.1 5.84,51.82 5.01,50.99 R3.2
-4
  Top 0.406: LED-4.1 5.84,65.79 5.01,64.96 R4.2
-5
  Top 0.406: LED-5.1 5.84,79.76 5.01,78.93 R5.2
-6
  Top 0.406: LED-6.1 5.84,93.73 5.01,92.9 R6.2
-7
  Top 0.406: LED-7.1 18.03,9.91 17.2,9.08 R7.2
-8
  Top 0.406: LED-8.1 18.03,23.88 17.2,23.05 R8.2
-9
  Top 0.406: LED-9.1 18.03,37.85 17.2,37.02 R9.2
-10
  Top 0.406: LED-10.1 18.03,51.82 17.2,50.99 R10.2
-11
  Top 0.406: LED-11.1 18.03,65.79 17.2,64.96 R11.2
-12
  Top 0.406: LED-12.1 18.03,79.76 17.2,78.93 R12.2
-13
  Top 0.406: LED-13.1 18.03,93.73 17.2,92.9 R13.2
-14
  Top 0.406: LED-14.1 30.23,9.91 29.4,9.08 R14.2
-15
  Top 0.406: LED-15.1 30.23,23.88 29.4,23.05 R15.2
-16
  Top 0.406: LED-16.1 30.23,37.85 29.4,37.02 R16.2
-17
  Top 0.406: LED-17.1 30.23,51.82 29.4,50.99 R17.2
-18
  Top 0.406: LED-18.1 30.23,65.79 29.4,64.96 R18.2
-19
  Top 0.406: LED-19.1 30.23,79.76 29.4,78.93 R19.2
-20
  Top 0.406: LED-20.1 30.23,93.73 29.4,92.9 R20.2
-21
  Top 0.406: LED-21.1 42.42,9.91 41.59,9.08 R21.2
-22
  Top 0.406: LED-22.1 42.42,23.88 41.59,23.05 R22.2
-23
  Top 0.406: LED-23.1 42.42,37.85 41.59,37.02 R23.2
-24
  Top 0.406: LED-24.1 42.42,51.82 41.59,50.99 R24.2
-25
  Top 0.406: LED-25.1 42.42,65.79 41.59,64.96 R25.2
-26
  Top 0.406: LED-26.1 42.42,79.76 41.59,78.93 R26.2
-27
  Top 0.406: LED-27.1 42.42,93.73 41.59,92.9 R27.2
-28
  Top 0.406: LED-28.1 54.61,9.91 53.78,9.08 R28.2
-29
  Top 0.406: LED-29.1 54.61,23.88 53.78,23.05 R29.2
-30
  Top 0.406: LED-30.1 54.61,37.85 53.78,37.02 R30.2
-31
  Top 0.406: LED-31.1 54.61,51.82 53.78,50.99 R31.2
-32
  Top 0.406: LED-32.1 54.61,65.79 53.78,64.96 R32.2
-33
  Top 0.406: LED-33.1 54.61,79.76 53.78,78.93 R33.2
-34
  Top 0.406: LED-34.1 54.61,93.73 53.78,92.9 R34.2
-35
  Top 0.406: LED-35.1 66.8,9.91 65.97,9.08 R35.2
-36
  Top 0.406: LED-36.1 66.8,23.88 65.97,23.05 R36.2
-37
  Top 0.406: LED-37.1 66.8,37.85 65.97,37.02 R37.2
-38
  Top 0.406: LED-38.1 66.8,51.82 65.97,50.99 R38.2
-39
  Top 0.406: LED-39.1 66.8,65.79 65.97,64.96 R39.2
-40
  Top 0.406: LED-40.1 66.8,79.76 65.97,78.93 R40.2
-41
  Top 0.406: LED-41.1 66.8,93.73 65.97,92.9 R41.2
-42
  Top 0.406: LED-42.1 78.99,9.91 78.16,9.08 R42.2
-43
  Top 0.406: LED-43.1 78.99,23.88 78.16,23.05 R43.2
-44
  Top 0.406: LED-44.1 78.99,37.85 78.16,37.02 R44.2
-45
  Top 0.406: LED-45.1 78.99,51.82 78.16,50.99 R45.2
-46
  Top 0.406: LED-46.1 78.99,65.79 78.16,64.96 R46.2
-47
  Top 0.406: LED-47.1 78.99,79.76 78.16,78.93 R47.2
-48
  Top 0.406: LED-48.1 78.99,93.73 78.16,92.9 R48.2
-49
  Top 0.406: LED-49.1 91.19,9.91 90.36,9.08 R49.2
-50
  Top 0.406: LED-50.1 91.19,23.88 90.36,23.05 R50.2
-51
  Top 0.406: LED-51.1 91.19,37.85 90.36,37.02 R51.2
-52
  Top 0.406: LED-52.1 91.19,51.82 90.36,50.99 R52.2
-53
  Top 0.406: LED-53.1 91.19,65.79 90.36,64.96 R53.2
-54
  Top 0.406: LED-54.1 91.19,79.76 90.36,78.93 R54.2
-55
  Top 0.406: LED-55.1 91.19,93.73 90.36,92.9 R55.2
-56
  Top 0.406: LED-56.1 103.38,9.91 102.55,9.08 R56.2
-57
  Top 0.406: LED-57.1 103.38,23.88 102.55,23.05 R57.2
-58
  Top 0.406: LED-58.1 103.38,37.85 102.55,37.02 R58.2
-59
  Top 0.406: LED-59.1 103.38,51.82 102.55,50.99 R59.2
-60
  Top 0.406: LED-60.1 103.38,65.79 102.55,64.96 R60.2
-61
  Top 0.406: LED-61.1 103.38,79.76 102.55,78.93 R61.2
-62
  Top 0.406: LED-62.1 103.38,93.73 102.55,92.9 R62.2
-63
  Top 0.406: LED-63.1 115.57,9.91 114.74,9.08 R63.2
-64
  Top 0.406: LED-64.1 115.57,23.88 114.74,23.05 R64.2
-65
  Top 0.406: LED-65.1 115.57,37.85 114.74,37.02 R65.2
-66
  Top 0.406: LED-66.1 115.57,51.82 114.74,50.99 R66.2
-67
  Top 0.406: LED-67.1 115.57,65.79 114.74,64.96 R67.2
-68
  Top 0.406: LED-68.1 115.57,79.76 114.74,78.93 R68.2
-69
  Top 0.406: LED-69.1 115.57,93.73 114.74,92.9 R69.2
N$1
  Top 0.254: 6.92,7.17 6.86,7.24
  Top 0.406: LED.C 7.36,6.74 6.92,7.17 6.71,7.38 R.1
N$2
  Top 0.254: 6.92,21.15 6.86,21.21
  Top 0.406: LED1.C 7.36,20.7 6.92,21.15 6.71,21.36 R1.1
N$3
  Top 0.254: 6.92,35.12 6.86,35.18
  Top 0.406: LED2.C 7.36,34.67 6.92,35.12 6.71,35.33 R2.1
N$4
  Top 0.254: 6.92,49.08 6.86,49.15
  Top 0.406: LED3.C 7.36,48.64 6.92,49.08 6.71,49.3 R3.1
N$5
  Top 0.254: 6.92,63.06 6.86,63.12
  Top 0.406: LED4.C 7.36,62.61 6.92,63.06 6.71,63.27 R4.1
N$6
  Top 0.254: 6.92,77.03 6.86,77.09
  Top 0.406: LED5.C 7.36,76.59 6.92,77.03 6.71,77.23 R5.1
N$7
  Top 0.254: 6.92,91 6.86,91.06
  Top 0.406: LED6.C 7.36,90.56 6.92,91 6.71,91.2 R6.1
N$8
  Top 0.254: 19.11,7.17 19.05,7.24
  Top 0.406: LED7.C 19.55,6.74 19.11,7.17 18.9,7.38 R7.1
N$9
  Top 0.254: 19.11,21.15 19.05,21.21
  Top 0.406: LED8.C 19.55,20.7 19.11,21.15 18.9,21.36 R8.1
N$10
  Top 0.254: 19.11,35.12 19.05,35.18
  Top 0.406: LED9.C 19.55,34.67 19.11,35.12 18.9,35.33 R9.1
N$11
  Top 0.254: 19.11,49.08 19.05,49.15
  Top 0.406: LED10.C 19.55,48.64 19.11,49.08 18.9,49.3 R10.1
N$12
  Top 0.254: 19.11,63.06 19.05,63.12
  Top 0.406: LED11.C 19.55,62.61 19.11,63.06 18.9,63.27 R11.1
N$13
  Top 0.254: 19.11,77.03 19.05,77.09
  Top 0.406: LED12.C 19.55,76.59 19.11,77.03 18.9,77.23 R12.1
N$14
  Top 0.254: 19.11,91 19.05,91.06
  Top 0.406: LED13.C 19.55,90.56 19.11,91 18.9,91.2 R13.1
N$15
  Top 0.254: 31.3,7.17 31.24,7.24
  Top 0.406: LED14.C 31.75,6.74 31.3,7.17 31.1,7.38 R14.1
N$16
  Top 0.254: 31.3,21.15 31.24,21.21
  Top 0.406: LED15.C 31.75,20.7 31.3,21.15 31.1,21.36 R15.1
N$17
  Top 0.254: 31.3,35.12 31.24,35.18
  Top 0.406: LED16.C 31.75,34.67 31.3,35.12 31.1,35.33 R16.1
N$18
  Top 0.254: 31.3,49.08 31.24,49.15
  Top 0.406: LED17.C 31.75,48.64 31.3,49.08 31.1,49.3 R17.1
N$19
  Top 0.254: 31.3,63.06 31.24,63.12
  Top 0.406: LED18.C 31.75,62.61 31.3,63.06 31.1,63.27 R18.1
N$20
  Top 0.254: 31.3,77.03 31.24,77.09
  Top 0.406: LED19.C 31.75,76.59 31.3,77.03 31.1,77.23 R19.1
N$21
  Top 0.254: 31.3,91 31.24,91.06
  Top 0.406: LED20.C 31.75,90.56 31.3,91 31.1,91.2 R20.1
N$22
  Top 0.254: 43.5,7.17 43.43,7.24
  Top 0.406: LED21.C 43.94,6.74 43.5,7.17 43.29,7.38 R21.1
N$23
  Top 0.254: 43.5,21.15 43.43,21.21
  Top 0.406: LED22.C 43.94,20.7 43.5,21.15 43.29,21.36 R22.1
N$24
  Top 0.254: 43.5,35.12 43.43,35.18
  Top 0.406: LED23.C 43.94,34.67 43.5,35.12 43.29,35.33 R23.1
N$25
  Top 0.254: 43.5,49.08 43.43,49.15
  Top 0.406: LED24.C 43.94,48.64 43.5,49.08 43.29,49.3 R24.1
N$26
  Top 0.254: 43.5,63.06 43.43,63.12
  Top 0.406: LED25.C 43.94,62.61 43.5,63.06 43.29,63.27 R25.1
N$27
  Top 0.254: 43.5,77.03 43.43,77.09
  Top 0.406: LED26.C 43.94,76.59 43.5,77.03 43.29,77.23 R26.1
N$28
  Top 0.254: 43.5,91 43.43,91.06
  Top 0.406: LED27.C 43.94,90.56 43.5,91 43.29,91.2 R27.1
N$29
  Top 0.254: 55.69,7.17 55.63,7.24
  Top 0.406: LED28.C 56.13,6.74 55.69,7.17 55.48,7.38 R28.1
N$30
  Top 0.254: 55.69,21.15 55.63,21.21
  Top 0.406: LED29.C 56.13,20.7 55.69,21.15 55.48,21.36 R29.1
N$31
  Top 0.254: 55.69,35.12 55.63,35.18
  Top 0.406: LED30.C 56.13,34.67 55.69,35.12 55.48,35.33 R30.1
N$32
  Top 0.254: 55.69,49.08 55.63,49.15
  Top 0.406: LED31.C 56.13,48.64 55.69,49.08 55.48,49.3 R31.1
N$33
  Top 0.254: 55.69,63.06 55.63,63.12
  Top 0.406: LED32.C 56.13,62.61 55.69,63.06 55.48,63.27 R32.1
N$34
  Top 0.254: 55.69,77.03 55.63,77.09
  Top 0.406: LED33.C 56.13,76.59 55.69,77.03 55.48,77.23 R33.1
N$35
  Top 0.254: 55.69,91 55.63,91.06
  Top 0.406: LED34.C 56.13,90.56 55.69,91 55.48,91.2 R34.1
N$36
  Top 0.254: 67.88,7.17 67.82,7.24
  Top 0.406: LED35.C 68.32,6.74 67.88,7.17 67.67,7.38 R35.1
N$37
  Top 0.254: 67.88,21.15 67.82,21.21
  Top 0.406: LED36.C 68.32,20.7 67.88,21.15 67.67,21.36 R36.1
N$38
  Top 0.254: 67.88,35.12 67.82,35.18
  Top 0.406: LED37.C 68.32,34.67 67.88,35.12 67.67,35.33 R37.1
N$39
  Top 0.254: 67.88,49.08 67.82,49.15
  Top 0.406: LED38.C 68.32,48.64 67.88,49.08 67.67,49.3 R38.1
N$40
  Top 0.254: 67.88,63.06 67.82,63.12
  Top 0.406: LED39.C 68.32,62.61 67.88,63.06 67.67,63.27 R39.1
N$41
  Top 0.254: 67.88,77.03 67.82,77.09
  Top 0.406: LED40.C 68.32,76.59 67.88,77.03 67.67,77.23 R40.1
N$42
  Top 0.254: 67.88,91 67.82,91.06
  Top 0.406: LED41.C 68.32,90.56 67.88,91 67.67,91.2 R41.1
N$43
  Top 0.254: 80.07,7.17 80.01,7.24
  Top 0.406: LED42.C 80.51,6.74 80.07,7.17 79.86,7.38 R42.1
N$44
  Top 0.254: 80.07,21.15 80.01,21.21
  Top 0.406: LED43.C 80.51,20.7 80.07,21.15 79.86,21.36 R43.1
N$45
  Top 0.254: 80.07,35.12 80.01,35.18
  Top 0.406: LED44.C 80.51,34.67 80.07,35.12 79.86,35.33 R44.1
N$46
  Top 0.254: 80.07,49.08 80.01,49.15
  Top 0.406: LED45.C 80.51,48.64 80.07,49.08 79.86,49.3 R45.1
N$47
  Top 0.254: 80.07,63.06 80.01,63.12
  Top 0.406: LED46.C 80.51,62.61 80.07,63.06 79.86,63.27 R46.1
N$48
  Top 0.254: 80.07,77.03 80.01,77.09
  Top 0.406: LED47.C 80.51,76.59 80.07,77.03 79.86,77.23 R47.1
N$49
  Top 0.254: 80.07,91 80.01,91.06
  Top 0.406: LED48.C 80.51,90.56 80.07,91 79.86,91.2 R48.1
N$50
  Top 0.254: 92.27,7.17 92.2,7.24
  Top 0.406: LED49.C 92.71,6.74 92.27,7.17 92.06,7.38 R49.1
N$51
  Top 0.254: 92.27,21.15 92.2,21.21
  Top 0.406: LED50.C 92.71,20.7 92.27,21.15 92.06,21.36 R50.1
N$52
  Top 0.254: 92.27,35.12 92.2,35.18
  Top 0.406: LED51.C 92.71,34.67 92.27,35.12 92.06,35.33 R51.1
N$53
  Top 0.254: 92.27,49.08 92.2,49.15
  Top 0.406: LED52.C 92.71,48.64 92.27,49.08 92.06,49.3 R52.1
N$54
  Top 0.254: 92.27,63.06 92.2,63.12
  Top 0.406: LED53.C 92.71,62.61 92.27,63.06 92.06,63.27 R53.1
N$55
  Top 0.254: 92.27,77.03 92.2,77.09
  Top 0.406: LED54.C 92.71,76.59 92.27,77.03 92.06,77.23 R54.1
N$56
  Top 0.254: 92.27,91 92.2,91.06
  Top 0.406: LED55.C 92.71,90.56 92.27,91 92.06,91.2 R55.1
N$57
  Top 0.254: 104.46,7.17 104.39,7.24
  Top 0.406: LED56.C 104.9,6.74 104.46,7.17 104.25,7.38 R56.1
N$58
  Top 0.254: 104.46,21.15 104.39,21.21
  Top 0.406: LED57.C 104.9,20.7 104.46,21.15 104.25,21.36 R57.1
N$59
  Top 0.254: 104.46,35.12 104.39,35.18
  Top 0.406: LED58.C 104.9,34.67 104.46,35.12 104.25,35.33 R58.1
N$60
  Top 0.254: 104.46,49.08 104.39,49.15
  Top 0.406: LED59.C 104.9,48.64 104.46,49.08 104.25,49.3 R59.1
N$61
  Top 0.254: 104.46,63.06 104.39,63.12
  Top 0.406: LED60.C 104.9,62.61 104.46,63.06 104.25,63.27 R60.1
N$62
  Top 0.254: 104.46,77.03 104.39,77.09
  Top 0.406: LED61.C 104.9,76.59 104.46,77.03 104.25,77.23 R61.1
N$63
  Top 0.254: 104.46,91 104.39,91.06
  Top 0.406: LED62.C 104.9,90.56 104.46,91 104.25,91.2 R62.1
N$64
  Top 0.254: 116.65,7.17 116.59,7.24
  Top 0.406: LED63.C 117.09,6.74 116.65,7.17 116.44,7.38 R63.1
N$65
  Top 0.254: 116.65,21.15 116.59,21.21
  Top 0.406: LED64.C 117.09,20.7 116.65,21.15 116.44,21.36 R64.1
N$66
  Top 0.254: 116.65,35.12 116.59,35.18
  Top 0.406: LED65.C 117.09,34.67 116.65,35.12 116.44,35.33 R65.1
N$67
  Top 0.254: 116.65,49.08 116.59,49.15
  Top 0.406: LED66.C 117.09,48.64 116.65,49.08 116.44,49.3 R66.1
N$68
  Top 0.254: 116.65,63.06 116.59,63.12
  Top 0.406: LED67.C 117.09,62.61 116.65,63.06 116.44,63.27 R67.1
N$69
  Top 0.254: 116.65,77.03 116.59,77.09
  Top 0.406: LED68.C 117.09,76.59 116.65,77.03 116.44,77.23 R68.1
N$70
  Top 0.254: 116.65,91 116.59,91.06
  Top 0.406: LED69.C 117.09,90.56 116.65,91 116.44,91.2 R69.1

## Text on the board
Dimension: One vertical strip equal 1 unit. This is a panel of 5 'boards' | ROUTE OUT | ROUTE OUT | ROUTE OUT | ROUTE OUT | ROUTE OUT | ROUTE OUT | ROUTE OUT | ROUTE OUT | ROUTE OUT | ROUTE OUT | ROUTE OUT | ROUTE OUT | ROUTE OUT | ROUTE OUT | ROUTE OUT | ROUTE OUT | ROUTE OUT | ROUTE OUT | ROUTE OUT | ROUTE OUT | ROUTE OUT | ROUTE OUT | ROUTE OUT | ROUTE OUT | ROUTE OUT | ROUTE OUT | ROUTE OUT | ROUTE OUT | ROUTE OUT | ROUTE OUT | ROUTE OUT | ROUTE OUT | ROUTE OUT | ROUTE OUT | ROUTE OUT | ROUTE OUT | ROUTE OUT | ROUTE OUT | ROUTE OUT | ROUTE OUT | ROUTE OUT | ROUTE OUT | ROUTE OUT | ROUTE OUT | ROUTE OUT | ROUTE OUT | ROUTE OUT | ROUTE OUT | ROUTE OUT | ROUTE OUT | ROUTE OUT | ROUTE OUT | ROUTE OUT | ROUTE OUT | ROUTE OUT | ROUTE OUT | ROUTE OUT | ROUTE OUT | ROUTE OUT | ROUTE OUT | One vertical strip equal 1 unit. This is a panel of 5 'boards'
tPlace: - | - | - | - | - | - | - | - | - | - | + | + | + | + | + | + | + | + | + | + | - | - | - | - | - | - | - | - | - | - | + | + | + | + | + | + | + | + | + | + | - | - | - | - | - | - | - | - | - | - | + | + | + | + | + | + | + | + | + | + | - | - | - | - | - | - | - | - | - | - | + | + | + | + | + | + | + | + | + | + | - | - | - | - | - | - | - | - | - | - | + | + | + | + | + | + | + | + | + | + | - | - | - | - | - | - | - | - | - | - | + | + | + | + | + | + | + | + | + | + | - | - | - | - | - | - | - | - | - | - | + | + | + | + | + | + | + | + | + | +
bPlace: Purple | Purple | Purple | Purple | Purple | Purple | Purple | Purple | Purple | Purple | Pink | Pink | Pink | Pink | Pink | Pink | Pink | Pink | Pink | Pink | White | White | White | White | White | White | White | White | White | White | Yellow | Yellow | Yellow | Yellow | Yellow | Yellow | Yellow | Yellow | Yellow | Yellow | Green | Green | Green | Green | Green | Green | Green | Green | Green | Green | Blue | Blue | Blue | Blue | Blue | Blue | Blue | Blue | Blue | Blue | Red | Red | Red | Red | Red | Red | Red | Red | Red | Red